# EAGLE board schematic (EAGLE 6.1)
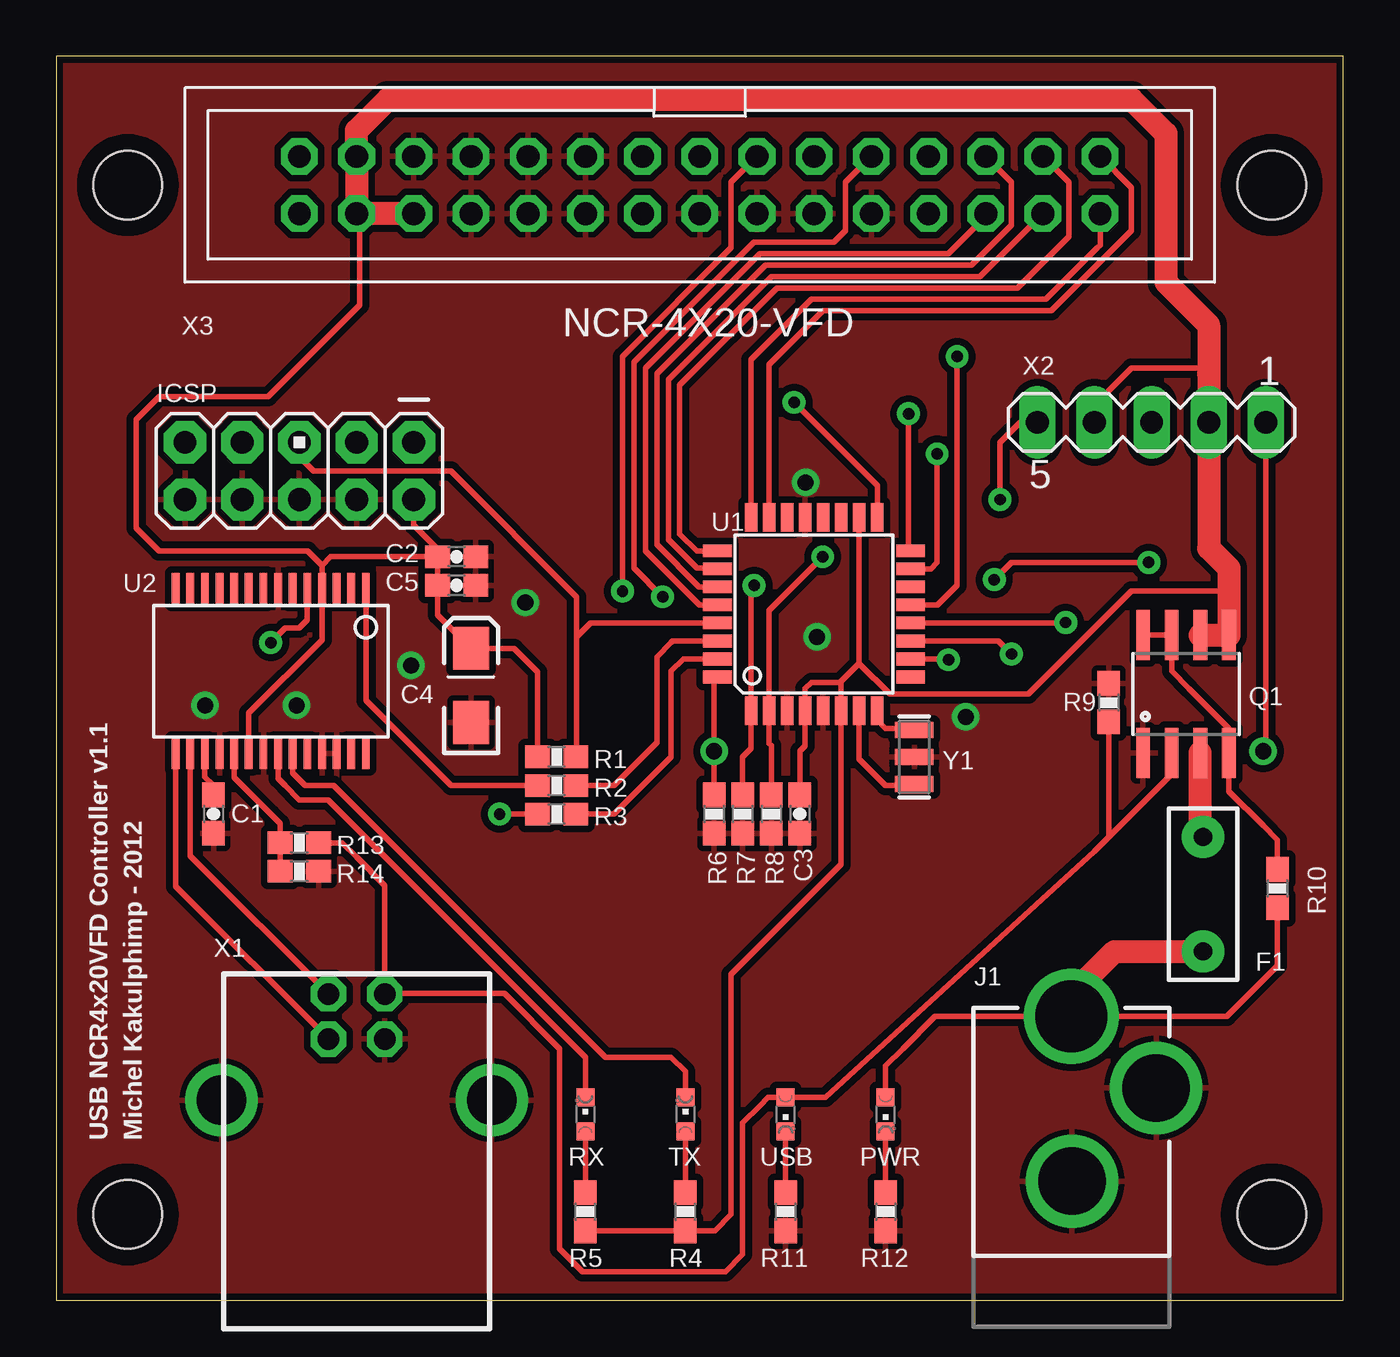
[diagram p0: board, top side]
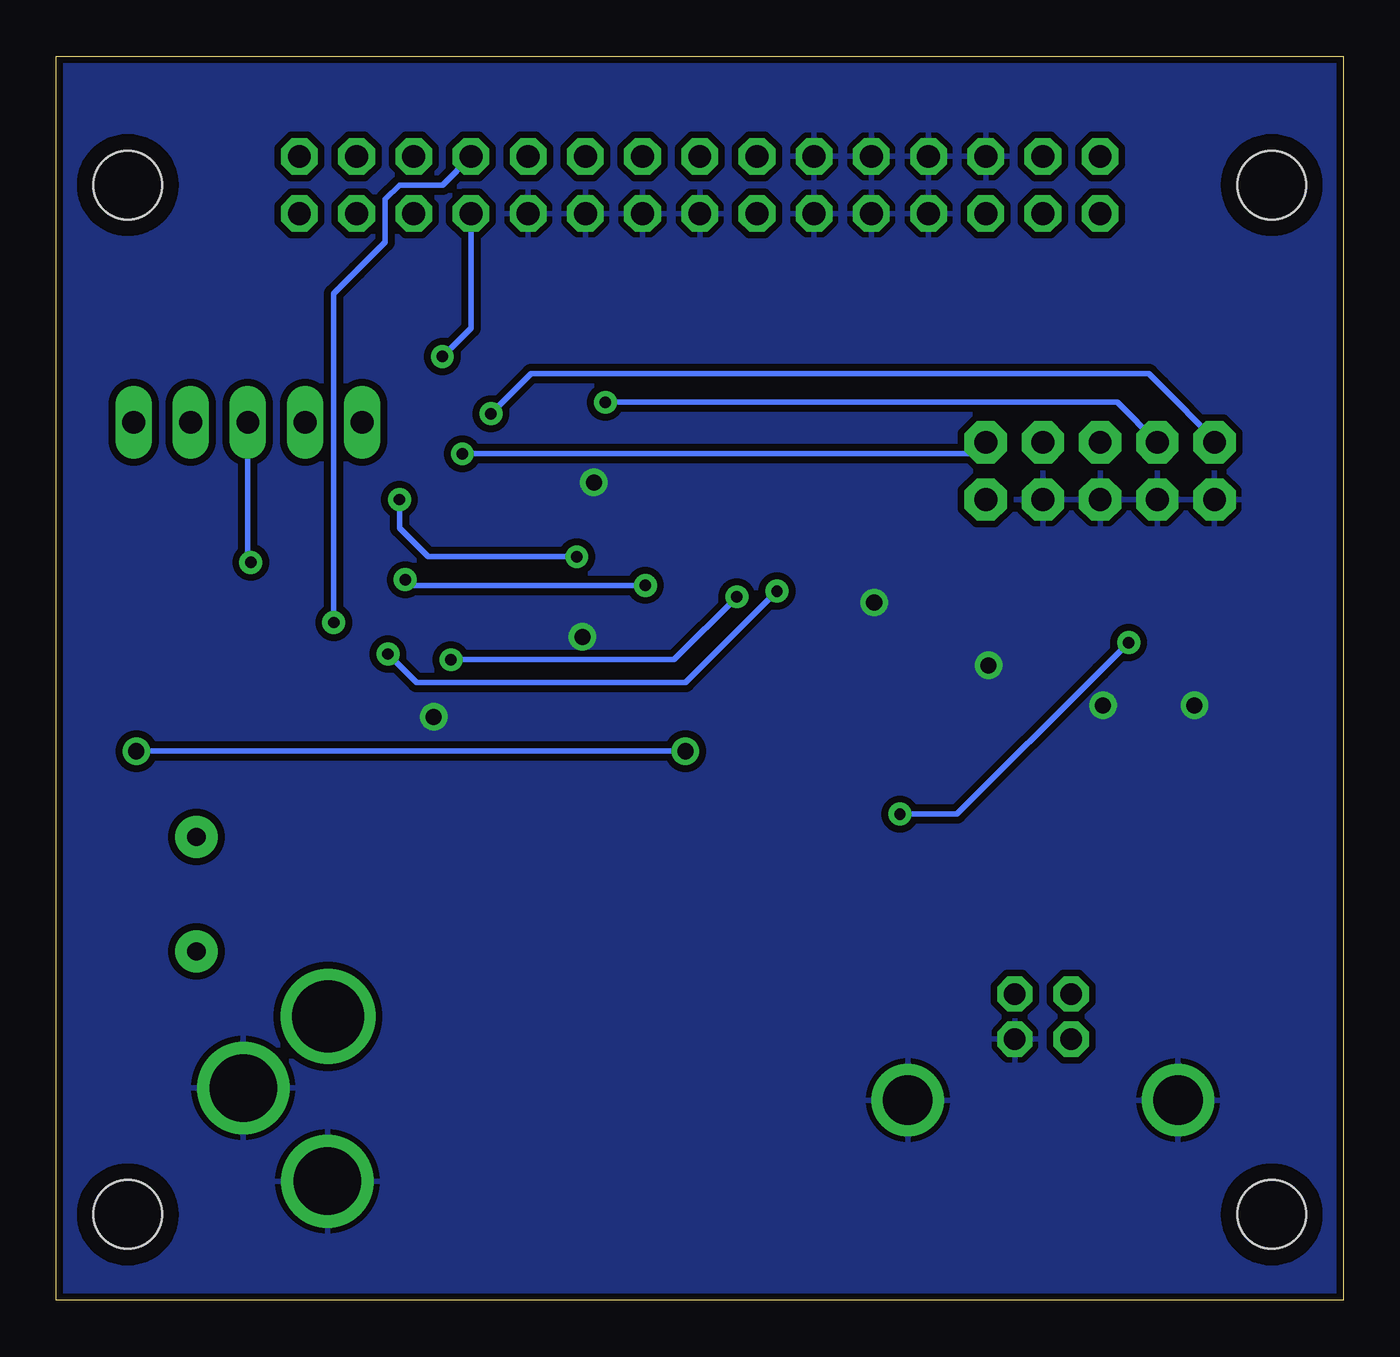
[diagram p1: board, bottom side, seen from below]

Size 57.15 x 55.25 mm. Coordinates in mm from the lower left corner, seen from the top.
Outline: 0,0 57.15,0 57.15,55.25 0,55.25 0,0
Copper layers (1*16): Top 0.035mm / dielectric 1.5mm / Bottom 0.035mm
Design rules: minimum track width 8mil, minimum drill 20mil, track to track 8mil, track to pad 8mil, pad to pad 8mil, via to via 8mil, smd to smd 8mil, copper to edge 10mil, drill to drill 8mil, minimum pad ring 12mil, minimum via ring 10mil, stop-mask expansion 4mil, vias tented up to drill 28mil, thermal gap 10mil
Net classes: 2 gnd: width 0.305 mm, drill 0.711 mm, clearance 0.254 mm; 3 usbvcc: width 0.508 mm, drill 0.711 mm, clearance 0.254 mm; 4 aref: width 0.406 mm

## Footprints (pad centres in the part's own frame; a part is rotated, then mirrored left to right if it is on the bottom)
0603-CAP = smd 1.1 x 1: 1 -0.85,0; 2 0.85,0
EIA3216-KIT = smd 1.9 x 1.6: A 1.65,0; C -1.65,0
PTC = drill 0.8 pad 1.88: P$1 -2.54,0; P$2 2.54,0
AVR_ICSP = drill 1.016 pad 1.88 octagon: 1 -1.27,5.08; 2 1.27,5.08; 3 -1.27,2.54; 4 1.27,2.54; 5 -1.27,0; 6 1.27,0; 7 -1.27,-2.54; 8 1.27,-2.54; 9 -1.27,-5.08; 10 1.27,-5.08
POWER_JACK_PTH_LOCK = drill 2.997 pad 4.115: GND 0.025,6.557; GNDBREAK 3.762,10.7 | drill 3.2 pad 4.115: PWR 0,13.878
STAND-OFF-TIGHT = hole 3.048: 0,0
CHIPLED_0603 = smd 0.8 x 0.8: A 0,-0.75; C 0,0.75
SOIC8 = smd 0.61 x 2.21: 1 -1.905,-2.616; 2 -0.635,-2.616; 3 0.635,-2.616; 4 1.905,-2.616; 5 1.905,2.616; 6 0.635,2.616; 7 -0.635,2.616; 8 -1.905,2.616
0603-RES = smd 1.1 x 1: 1 -0.85,0; 2 0.85,0
TQFP32-08 = smd 1.27 x 0.559: 1 -4.293,2.8; 2 -4.293,2; 3 -4.293,1.2; 4 -4.293,0.4; 5 -4.293,-0.4; 6 -4.293,-1.2; 7 -4.293,-2; 8 -4.293,-2.8; 17 4.293,-2.8; 18 4.293,-2; 19 4.293,-1.2; 20 4.293,-0.4; 21 4.293,0.4; 22 4.293,1.2; 23 4.293,2; 24 4.293,2.8 | smd 0.559 x 1.27: 9 -2.8,-4.293; 10 -2,-4.293; 11 -1.2,-4.293; 12 -0.4,-4.293; 13 0.4,-4.293; 14 1.2,-4.293; 15 2,-4.293; 16 2.8,-4.293; 25 2.8,4.293; 26 2,4.293; 27 1.2,4.293; 28 0.4,4.293; 29 -0.4,4.293; 30 -1.2,4.293; 31 -2,4.293; 32 -2.8,4.293
SSOP28DB = smd 0.348 x 1.397: 1 -4.225,-3.656; 2 -3.575,-3.656; 3 -2.925,-3.656; 4 -2.275,-3.656; 5 -1.625,-3.656; 6 -0.975,-3.656; 7 -0.325,-3.656; 8 0.325,-3.656; 9 0.975,-3.656; 10 1.625,-3.656; 11 2.275,-3.656; 12 2.925,-3.656; 13 3.575,-3.656; 14 4.225,-3.656; 15 4.225,3.656; 16 3.575,3.656; 17 2.925,3.656; 18 2.275,3.656; 19 1.625,3.656; 20 0.975,3.656; 21 0.325,3.656; 22 -0.325,3.656; 23 -0.975,3.656; 24 -1.625,3.656; 25 -2.275,3.656; 26 -2.925,3.656; 27 -3.575,3.656; 28 -4.225,3.656
PN61729 = drill 0.95 octagon: 1 1.25,4.71; 2 -1.25,4.71; 3 -1.25,2.71; 4 1.25,2.71 | drill 2.2: P$1 -6,0; P$2 6,0
MA05-1 = drill 1.016 long: 1 -5.08,0; 2 -2.54,0; 3 0,0; 4 2.54,0; 5 5.08,0
NCR-4X20-VFD = drill 1.016 octagon: 1 -20.32,-1.27; 2 -20.32,1.27; 3 -17.78,-1.27; 4 -17.78,1.27; 5 -15.24,-1.27; 6 -15.24,1.27; 7 -12.7,-1.27; 8 -12.7,1.27; 9 -10.16,-1.27; 10 -10.16,1.27; 11 -7.62,-1.27; 12 -7.62,1.27; 13 -5.08,-1.27; 14 -5.08,1.27; 15 -2.54,-1.27; 16 -2.54,1.27; 17 0,-1.27; 18 0,1.27; 19 2.54,-1.27; 20 2.54,1.27; 21 5.08,-1.27; 22 5.08,1.27; 23 7.62,-1.27; 24 7.62,1.27; 25 10.16,-1.27; 26 10.16,1.27; 27 12.7,-1.27; 28 12.7,1.27; 29 15.24,-1.27; 30 15.24,1.27
RESONATOR-SMD = smd 0.7 x 1.7: 1 -1.2,0; 2 0,0; 3 1.2,0

## Placement (x,y rotation side)
C1  100n  [0603-CAP]  6.99,21.59 270 top
C2  100n  [0603-CAP]  17.78,33.02 0 top
C3  100n  [0603-CAP]  33.02,21.59 270 top
C4  10u  [EIA3216-KIT]  18.41,27.3 90 top
C5  100n  [0603-CAP]  17.78,31.75 0 top
F1  PTCPTH  [PTC]  50.93,18.03 270 top
ICSP  AVR_SPI_PROG2PTH  [AVR_ICSP]  10.8,36.83 270 top
J1  POWER_JACKPTH_LOCK  [POWER_JACK_PTH_LOCK]  45.09,-1.27 0 top
JP1  STAND-OFFTIGHT  [STAND-OFF-TIGHT]  53.98,3.81 0 top
JP2  STAND-OFFTIGHT  [STAND-OFF-TIGHT]  3.17,3.81 0 top
JP3  STAND-OFFTIGHT  [STAND-OFF-TIGHT]  3.17,49.53 0 top
JP4  STAND-OFFTIGHT  [STAND-OFF-TIGHT]  53.98,49.53 0 top
PWR  [CHIPLED_0603]  36.83,8.26 180 top
Q1  FDS4897  [SOIC8]  50.16,26.92 0 top
R1  10k  [0603-RES]  22.22,24.13 0 top
R2  1k  [0603-RES]  22.22,22.86 0 top
R3  1k  [0603-RES]  22.22,21.59 0 top
R4  1k  [0603-RES]  27.94,3.94 90 top
R5  1k  [0603-RES]  23.49,3.94 90 top
R6  10k  [0603-RES]  29.21,21.59 270 top
R7  10k  [0603-RES]  30.48,21.59 270 top
R8  10k  [0603-RES]  31.75,21.59 270 top
R9  10k  [0603-RES]  46.74,26.54 270 top
R10  10k  [0603-RES]  54.23,18.29 270 top
R11  1k  [0603-RES]  32.38,3.94 270 top
R12  1k  [0603-RES]  36.83,3.94 270 top
R13  4k7  [0603-RES]  10.8,20.32 180 top
R14  10k  [0603-RES]  10.8,19.05 0 top
RX  [CHIPLED_0603]  23.49,8.26 0 top
TX  [CHIPLED_0603]  27.94,8.26 0 top
U1  ATMEGA168  [TQFP32-08]  33.66,30.48 90 top
U2  FT232RLSSOP  [SSOP28DB]  9.53,27.94 180 top
USB  [CHIPLED_0603]  32.38,8.26 180 top
X1  [PN61729]  13.34,8.89 0 top
X2  [MA05-1]  48.64,38.99 180 top
X3  NCR-4X20-VFD  [NCR-4X20-VFD]  26.04,49.53 180 top
Y1  RESONATORSMD  [RESONATOR-SMD]  38.1,24.13 90 top

## Library data of the parts
C1-C5 F1 ICSP J1 JP1-JP4 R1-R14 U1 U2 Y1 = SparkFun
PWR USB = led; COLOUR: RED
Q1 = library
RX = led; COLOUR: GREEN
TX = led; COLOUR: YELLOW
X1 = SmartPrj
X2 = con-lstb; OC_FARNELL: unknown; OC_NEWARK: unknown
X3 = library; OC_FARNELL: unknown; OC_NEWARK: unknown

## Nets
ENC_A: R6.1 U1.32 X2.1
ENC_B: R7.1 U1.1 X2.3
ENC_BUTTON: R8.1 U1.2 X2.5
GND [gnd]: C1.2 C2.2 C3.2 C4.C C5.2 ICSP.4 ICSP.6 ICSP.8 ICSP.10 J1.GND J1.GNDBREAK Q1.1 R6.2 R7.2 R8.2 R9.1 R11.2 R12.2 R14.2 U1.3 U1.5 U1.21 U2.7 U2.18 U2.21 U2.25 U2.26 X1.4 X1.P$1 X1.P$2 X3.10 X3.12 X3.14 X3.16 X3.19 X3.20 X3.21 X3.22 X3.23 X3.24 X3.25 Y1.2
N$1: R13.2 R14.1 U2.19
N$3: TX.C U2.23
N$4: RX.C U2.22
N$5: R4.2 TX.A
N$6: F1.P$1 Q1.3
N$7: C1.1 U2.17
N$8: R5.2 RX.A
N$9: U1.7 Y1.1
N$10: U1.8 Y1.3
N$11: Q1.4 Q1.7 Q1.8 R10.1
N$12: U2.16 X1.2
N$13: U2.15 X1.3
N$14: ICSP.7 U1.17
N$15: ICSP.9 U1.16
N$16: R2.1 U2.1
N$17: R3.1 U2.5
N$18: ICSP.1 U1.15
N$19: ICSP.5 R1.2 U1.29
N$22: R11.1 USB.C
N$23: PWR.C R12.1
URX: R2.2 U1.30
USB_VCC: Q1.2 R9.2 R13.1 USB.A X1.1
UTX: R3.2 U1.31
VCC: F1.P$2 J1.PWR PWR.A R10.2
VCC_SWITCHED: C2.1 C3.1 C4.A C5.1 ICSP.2 Q1.5 Q1.6 R1.1 R4.1 R5.1 U1.4 U1.6 U1.18 U2.4 U2.20 X2.2 X2.4 X3.26 X3.27 X3.28
VFD0: U1.23 X3.1
VFD1: U1.24 X3.2
VFD2: U1.25 X3.3
VFD3: U1.26 X3.4
VFD4: U1.27 X3.5
VFD5: U1.28 X3.6
VFD6: U1.12 X3.7
VFD7: U1.13 X3.8
VFD8: U1.10 X3.9
VFD9: U1.11 X3.13

## Tracks (layer width: path | path; a pad name or v marks a point on that pad's centre or on a via)
ENC_A  (via drill 0.71)
  Top 0.254: R6.1 v29.21,24.38 29.21,27.43 29.46,27.69 U1.32 | v53.59,24.38 53.72,24.51 X2.1
  Bottom 0.254: v29.21,24.38 v53.59,24.38
ENC_B  (via drill 0.51)
  Top 0.254: R7.1 30.48,24.13 30.86,24.5 U1.1 30.86,31.62 v30.99,31.75 | v41.66,32 42.42,32.77 v48.51,32.77
  Bottom 0.254: v30.99,31.75 41.4,31.75 v41.66,32 | v48.51,32.77 48.64,32.89 X2.3
ENC_BUTTON  (via drill 0.51)
  Top 0.254: R8.1 31.75,24.64 31.65,24.73 U1.2 31.65,30.64 v34.04,33.02 | v41.91,35.56 41.91,38.1 42.8,38.99 X2.5
  Bottom 0.254: v34.04,33.02 40.64,33.02 41.91,34.29 v41.91,35.56
GND  (via drill 0.71)
  other vias: 6.6,26.42 10.67,26.42 20.83,30.99 15.75,28.19 33.27,36.32 33.78,29.46 40.39,25.91
  pour Top (isolate 0.305): 0,55.25 0,0 57.15,0 57.15,55.25
  pour Bottom (isolate 0.305): 0,55.25 0,0 57.15,0 57.15,55.25
N$1
  Top 0.254: 7.87,24.31 U2.19 7.9,23.21 9.53,21.59 9.95,21.17 R13.2 9.95,19.47 9.84,19.37 | 9.84,19.37 9.53,19.05 | R14.1 9.95,19.27 9.84,19.37
N$3
  Top 0.254: U2.23 10.5,23.41 11.05,22.86 12.32,22.86 24.38,10.79 27.3,10.79 27.94,10.16 TX.C 27.94,8.89
N$4
  Top 0.254: U2.22 9.85,23.17 10.16,22.86 10.8,22.22 12.07,22.22 23.49,10.79 RX.C
N$5
  Top 0.254: R4.2 TX.A
N$6
  Top 1.016: F1.P$1 50.8,20.7 Q1.3
N$7
  Top 0.254: U2.17 6.6,23.25 6.99,22.86 C1.1
N$8
  Top 0.254: RX.A R5.2
N$9
  Top 0.254: U1.7 35.66,24.04 36.83,22.86 38.03,22.86 Y1.1
N$10
  Top 0.254: U1.8 36.45,25.77 36.83,25.4 38.1,25.4 Y1.3
N$11
  Top 0.254: Q1.8 Q1.7 49.53,27.94 50.29,27.18 52.07,25.4 Q1.4 52.07,22.61 53.59,21.08 54.23,20.45 R10.1
N$12
  Top 0.254: U2.16 5.95,19.73 X1.2
N$13
  Top 0.254: U2.15 5.3,18.38 X1.3
N$14  (via drill 0.51)
  Top 0.254: U1.17 36.45,36.19 v32.77,39.88
  Bottom 0.254: v32.77,39.88 10.03,39.88 ICSP.7
N$15  (via drill 0.51)
  Top 0.254: v37.85,39.37 37.85,33.38 U1.16
  Bottom 0.254: ICSP.9 5.71,38.23 8.13,40.64 8.64,41.15 36.07,41.15 v37.85,39.37
N$16
  Top 0.254: U2.1 13.75,26.64 17.53,22.86 R2.1
N$17  (via drill 0.51)
  Top 0.254: v19.68,21.59 20.95,21.59 R3.1 | U2.5 11.15,30.2 10.8,29.84 10.16,29.84 v9.53,29.21
  Bottom 0.254: v19.68,21.59 17.14,21.59 10.8,27.94 v9.53,29.21
N$18  (via drill 0.51)
  Top 0.254: U1.15 38.83,32.48 39.12,32.77 v39.12,37.59
  Bottom 0.254: v39.12,37.59 16.38,37.59 ICSP.1
N$19
  Top 0.254: ICSP.5 10.8,37.47 11.43,36.83 17.53,36.83 23.11,31.24 23.11,29.46 | 23.11,29.46 23.11,24.13 R1.2 | U1.29 23.73,30.08 23.11,29.46
N$22
  Top 0.254: USB.C R11.1
N$23
  Top 0.254: PWR.C R12.1
URX
  Top 0.254: R2.2 24.77,22.86 26.67,24.77 26.67,28.57 27.3,29.21 27.38,29.28 U1.30
USB_VCC
  Top 0.254: R13.1 12.7,20.32 13.34,19.68 14.59,18.43 X1.1 14.61,13.62 19.91,13.62 22.35,11.18 22.35,2.29 23.37,1.27 29.72,1.27 30.48,2.03 30.48,7.87 31.24,8.64 31.61,9.01 USB.A 34.15,9.01 46.1,19.94 | 46.1,19.94 49.53,23.37 Q1.2 | R9.2 46.74,20.57 46.1,19.94
UTX
  Top 0.254: R3.2 24.77,21.59 27.3,24.13 27.3,27.94 27.84,28.48 U1.31
VCC
  Top 0.254: PWR.A 36.83,10.41 37.59,11.18 39.02,12.61 J1.PWR 51.98,12.61 54.1,14.73 54.23,14.86 R10.2
  Top 1.016: J1.PWR 45.09,13.59 46.99,15.49 F1.P$2
VCC_SWITCHED
  Top 0.254: U1.4 33.26,24.62 33.02,24.38 C3.1 | 51.18,41.15 50.93,41.4 47.75,41.4 46.1,39.75 X2.4 | ICSP.2 15.88,34.42 16.93,33.36 C2.1 | R5.1 R4.1 29.25,3.09 29.97,3.81 29.97,14.48 34.85,19.36 U1.6 34.85,27.49 | C2.1 16.93,31.92 | 16.93,31.92 16.76,31.75 | 11.8,32.63 U2.4 11.8,29.33 8.55,26.08 U2.20 | 11.8,32.63 12.19,33.02 C2.1 | R1.1 21.38,27.9 20.32,28.95 C4.A 16.93,30.44 C5.1 16.93,31.92 | 13.46,48.26 13.46,44.2 9.4,40.13 4.57,40.13 3.56,39.12 3.56,34.29 4.57,33.27 11.15,33.27 11.8,32.63 | 34.85,27.49 35.66,28.29 | U1.18 35.66,28.29 | U1.4 33.26,27.06 | U1.4 33.26,27.16 33.53,27.43 34.8,27.43 34.85,27.49 | 52.07,31.5 47.75,31.5 43.18,26.92 37.02,26.92 35.66,28.29 | C2.1 17.27,33.02
  Top 1.016: Q1.6 Q1.5 52.07,31.5 52.07,32.51 51.18,33.4 51.18,38.86 | X3.26 13.46,48.26 X3.28 X3.27 13.34,51.94 14.73,53.34 47.75,53.34 49.28,51.82 49.28,45.21 51.18,43.31 51.18,41.15 X2.2 51.18,38.86 | 51.18,38.86 51.31,38.86
VFD0
  Top 0.254: U1.23 31.65,41.56 34.04,43.94 44.2,43.94 47.75,47.5 47.75,49.4 X3.1
VFD1
  Top 0.254: U1.24 30.86,41.78 33.53,44.45 43.94,44.45 46.23,46.74 46.35,46.86 X3.2
VFD2
  Top 0.254: X3.3 44.96,49.66 44.96,47.24 42.67,44.96 32,44.96 27.69,40.64 27.69,34.04 28.44,33.28 U1.25
VFD3
  Top 0.254: X3.4 41.02,45.47 31.75,45.47 27.18,40.89 27.18,33.78 28.45,32.51 29.33,32.51 U1.26
VFD4
  Top 0.254: U1.27 28.54,31.68 26.67,33.55 26.67,41.15 31.5,45.97 40.64,45.97 42.42,47.75 42.42,49.66 X3.5
VFD5
  Top 0.254: U1.28 28.56,30.88 26.16,33.27 26.16,41.4 31.24,46.48 39.62,46.48 41.4,48.26 X3.6
VFD6  (via drill 0.51)
  Top 0.254: v44.83,30.1 arc-90 44.81,30.08 U1.12
  Bottom 0.254: v44.83,30.1 44.83,44.7 43.81,45.72 42.55,46.99 42.55,48.9 41.91,49.53 40.01,49.53 X3.7
VFD7  (via drill 0.51)
  Top 0.254: U1.13 39.13,30.88 40.01,31.75 v40.01,41.91
  Bottom 0.254: v40.01,41.91 38.73,43.18 X3.8
VFD8  (via drill 0.51)
  Top 0.254: X3.9 35.05,49.66 35.05,47.5 34.54,46.99 30.99,46.99 25.65,41.66 25.65,32.51 v26.92,31.24 | v39.62,28.45 arc90 39.59,28.48 U1.10
  Bottom 0.254: v26.92,31.24 29.72,28.45 v39.62,28.45
VFD9  (via drill 0.51)
  Top 0.254: U1.11 41.84,29.28 v42.42,28.7 | v25.15,31.5 25.15,41.91 29.97,46.74 29.97,49.66 X3.13
  Bottom 0.254: v25.15,31.5 29.21,27.43 41.15,27.43 v42.42,28.7

## Text on the board
tPlace: USB NCR4x20VFD Controller v1.1 | Michel Kakulphimp - 2012